# EAGLE board base (EAGLE 6.5.0)
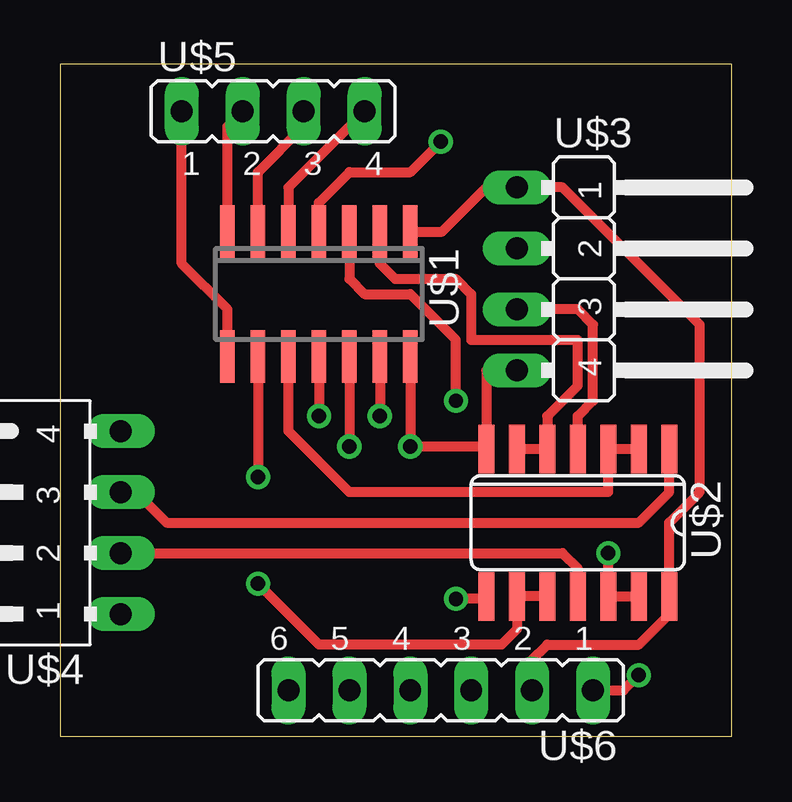
[diagram p0: board, top side]
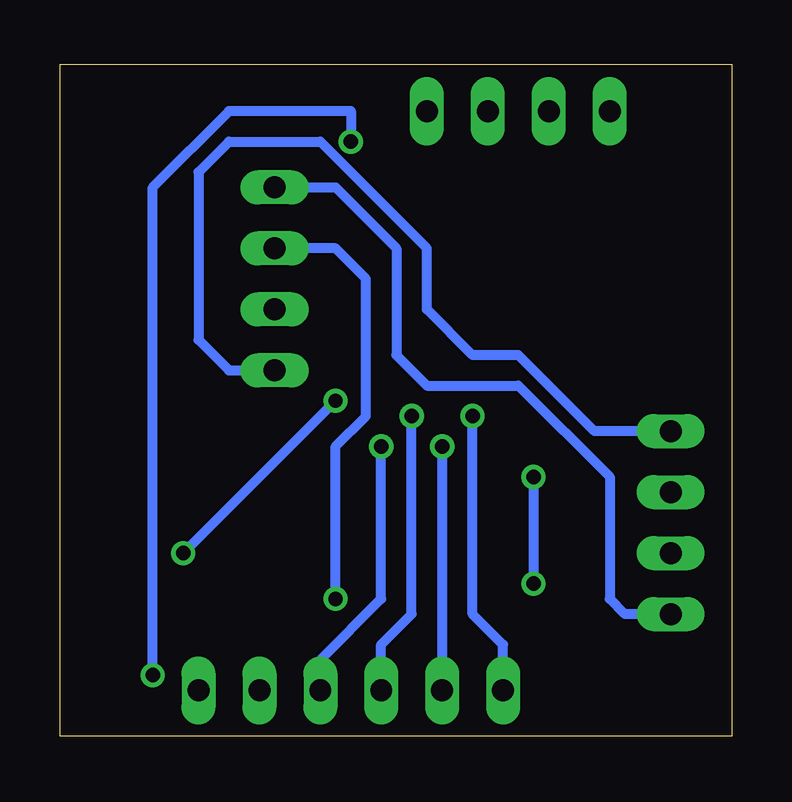
[diagram p1: board, bottom side, seen from below]

Size 28 x 28 mm. Coordinates in mm from the lower left corner, seen from the top.
Outline: 0,0 28,0 28,28 0,28 0,0
Copper layers (1*16): Top 0.035mm / dielectric 1.5mm / Bottom 0.035mm
Design rules "default": minimum track width 10mil, minimum drill 24mil, track to track 8mil, track to pad 8mil, pad to pad 8mil, via to via 8mil, smd to smd 8mil, copper to edge 40mil, drill to drill 8mil, minimum pad ring 10mil, minimum via ring 8mil, stop-mask expansion 4mil, vias tented up to drill 0mil, thermal gap 10mil

## Footprints (pad centres in the part's own frame; a part is rotated, then mirrored left to right if it is on the bottom)
16F1503 = smd 0.6 x 2.2: 1 -3.81,-2.6; 2 -2.54,-2.6; 3 -1.27,-2.6; 4 0,-2.6; 5 1.27,-2.6; 6 2.54,-2.6; 7 3.81,-2.6; 8 3.81,2.6; 9 2.54,2.6; 10 1.27,2.6; 11 0,2.6; 12 -1.27,2.6; 13 -2.54,2.6; 14 -3.81,2.6
SO14 = smd 0.66 x 2.032: 1 -3.81,-3.073; 2 -2.54,-3.073; 3 -1.27,-3.073; 4 0,-3.073; 5 1.27,-3.073; 6 2.54,-3.073; 7 3.81,-3.073; 8 3.81,3.073; 9 2.54,3.073; 10 1.27,3.073; 11 0,3.073; 12 -1.27,3.073; 13 -2.54,3.073; 14 -3.81,3.073
JUMPER4 = drill 0.914 long: 1 -2.54,-2.54; 2 0,-2.54; 3 2.54,-2.54; 4 5.08,-2.54
JUMPER4F = drill 0.914 long: 1 -3.81,-2.54; 2 -1.27,-2.54; 3 1.27,-2.54; 4 3.81,-2.54
JUMPER4M = drill 0.914 long: 1 -3.81,0; 2 -1.27,0; 3 1.27,0; 4 3.81,0
JUMPER6M = drill 0.914 long: 1 -6.35,0; 2 -3.81,0; 3 -1.27,0; 4 1.27,0; 5 3.81,0; 6 6.35,0

## Placement (x,y rotation side)
U$1  16F1503  [16F1503]  10.79,18.41 180 top
U$2  4016  [SO14]  21.59,8.89 180 top
U$3  JUMPER4  [JUMPER4]  21.59,20.32 270 top
U$4  JUMPER4F  [JUMPER4F]  0,8.89 90 top
U$5  JUMPER4M  [JUMPER4M]  8.89,26.04 0 top
U$6  JUMPER6M  [JUMPER6M]  15.88,1.91 180 top

## Library data of the parts
U$1-U$6 = !stavebnice03

## Nets
N$1: U$1.14 U$2.7 U$3.4 U$4.4 U$6.3
N$2: U$1.1 U$2.14 U$3.1 U$4.1 U$6.2
N$3: U$2.1 U$4.3
N$4: U$1.9 U$2.9 U$2.10
N$5: U$1.2 U$2.5 U$2.6
N$6: U$1.3 U$2.12 U$2.13
N$7: U$1.10 U$2.2 U$2.3
N$8: U$2.4 U$3.3
N$9: U$2.11 U$4.2
N$10: U$2.8 U$3.2
N$11: U$1.11 U$6.6
N$12: U$1.5 U$5.4
N$13: U$1.4 U$6.1
N$14: U$1.13 U$6.4
N$15: U$1.12 U$6.5
N$16: U$1.6 U$5.3
N$17: U$1.7 U$5.2
N$18: U$1.8 U$5.1

## Tracks (layer width: path | path; a pad name or v marks a point on that pad's centre or on a via)
N$1  (via drill 0.6)
  Top 0.406: U$3.4 17.78,15.24 U$2.7 17.68,12.06 v14.61,12.06 U$1.14
  Bottom 0.406: U$6.3 17.14,3.17 14.61,5.71 v14.61,12.06 | U$3.4 20.95,15.24 22.23,16.51 22.23,23.5 20.95,24.77 17.14,24.77 12.7,20.32 12.7,17.78 10.79,15.88 8.89,15.88 5.71,12.7 U$4.4
N$2
  Top 0.406: U$6.2 19.68,3.17 20.32,3.81 24.13,3.81 25.4,5.08 U$2.14 25.4,8.89 26.67,10.16 26.67,17.14 20.95,22.86 U$3.1 17.78,22.86 15.94,21.02 U$1.1
  Bottom 0.406: U$4.1 4.45,5.08 5.08,5.71 5.08,10.79 8.89,14.61 12.7,14.61 13.97,15.88 13.97,20.32 16.51,22.86 U$3.1
N$3
  Top 0.406: U$2.1 25.4,10.16 24.13,8.89 4.45,8.89 3.17,10.16 U$4.3
N$4  (via drill 0.6)
  Top 0.406: U$2.10 U$2.9 19.05,4.45 18.41,3.81 10.79,3.81 v8.26,6.35 | U$1.9 v8.26,10.79
  Bottom 0.406: v8.26,10.79 v8.26,6.35
N$5
  Top 0.406: U$2.6 U$2.5 20.32,13.34 21.59,14.61 21.59,16.51 17.14,16.51 17.14,18.41 16.51,19.05 13.97,19.05 13.34,19.68 U$1.2
N$6  (via drill 0.6)
  Top 0.406: U$2.13 U$2.12 v22.86,7.62 | U$1.3 12.06,19.05 12.7,18.41 14.61,18.41 16.51,16.51 v16.51,13.97
  Bottom 0.406: v22.86,7.62 v16.51,13.97
N$7
  Top 0.406: 22.86,12.7 U$2.3 | U$2.3 22.86,10.16 12.06,10.16 9.53,12.7 U$1.10 | U$2.3 U$2.2
N$8
  Top 0.406: U$2.4 21.59,13.34 22.23,13.97 22.23,17.14 21.59,17.78 U$3.3
N$9
  Top 0.406: U$2.11 21.59,6.99 20.95,7.62 U$4.2
N$10  (via drill 0.6)
  Top 0.406: U$2.8 17.68,5.71 v16.51,5.71
  Bottom 0.406: U$3.2 16.51,20.32 15.24,19.05 15.24,13.34 16.51,12.06 v16.51,5.71
N$11  (via drill 0.6)
  Top 0.406: U$1.11 v10.79,13.34
  Bottom 0.406: U$6.6 9.53,3.81 10.79,5.08 v10.79,13.34
N$12
  Top 0.406: U$5.4 9.53,22.86 U$1.5
N$13  (via drill 0.6)
  Top 0.406: U$6.1 23.5,1.91 v24.13,2.54 | U$1.4 10.79,22.23 12.06,23.5 14.61,23.5 v15.88,24.77
  Bottom 0.406: v24.13,2.54 24.13,22.86 20.95,26.04 15.88,26.04 v15.88,24.77
N$14  (via drill 0.6)
  Top 0.406: U$1.13 v13.34,13.34
  Bottom 0.406: U$6.4 14.61,3.81 13.34,5.08 v13.34,13.34
N$15  (via drill 0.6)
  Top 0.406: U$1.12 v12.06,12.06
  Bottom 0.406: v12.06,12.06 U$6.5
N$16
  Top 0.406: U$1.6 8.26,23.5 10.16,25.4 U$5.3
N$17
  Top 0.406: U$1.7 6.99,25.4 U$5.2
N$18
  Top 0.406: U$1.8 6.99,17.78 5.08,19.68 U$5.1